# EAGLE board Neutrino-150 (EAGLE 6.1)
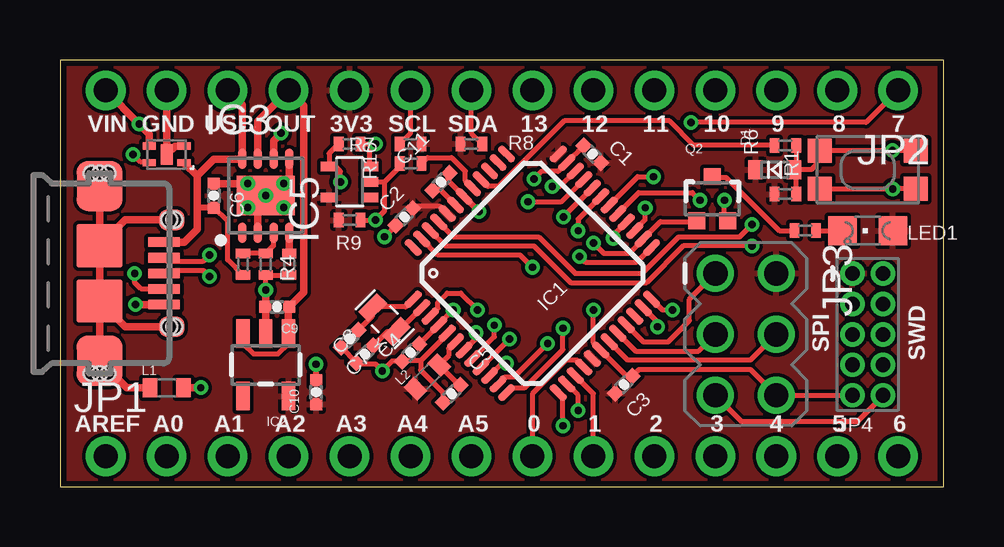
[diagram p0: board, top side]
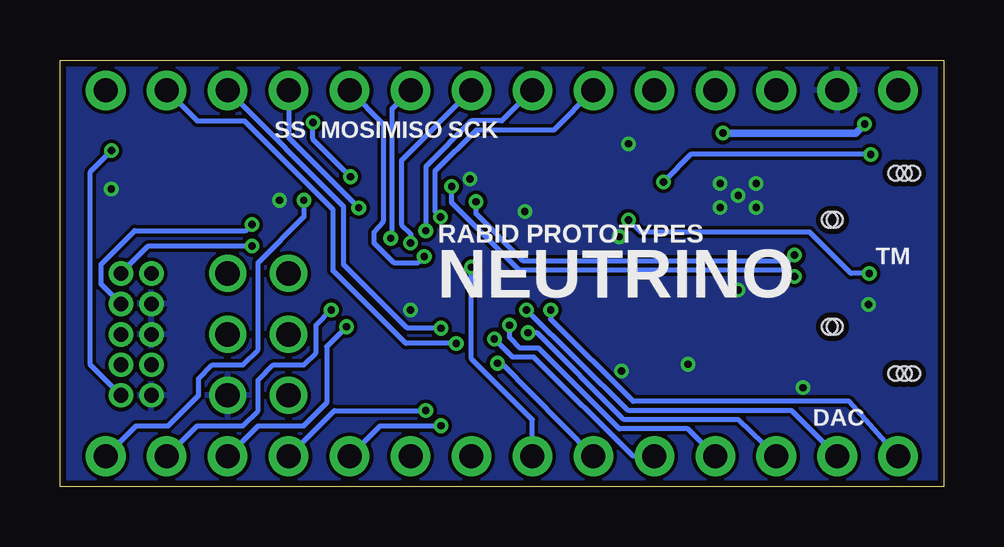
[diagram p1: board, bottom side, seen from below]

Size 36.83 x 17.78 mm. Coordinates in mm from the lower left corner, seen from the top.
Outline: 0,17.78 0,0 36.83,0 36.83,17.78 0,17.78
Copper layers (1*16): Top 0.035mm / dielectric 0.5mm / Bottom 0.035mm
Design rules: minimum track width 6mil, minimum drill 12mil, track to track 6mil, track to pad 6mil, pad to pad 6mil, via to via 6mil, smd to smd 4mil, copper to edge 10mil, drill to drill 10mil, minimum pad ring 6mil, minimum via ring 6mil, stop-mask expansion 1mil, vias tented up to drill 30mil, thermal gap 6mil
Net classes: 0 default: width 0.152 mm, drill 0.305 mm, clearance 0.152 mm; 1 USB: width 0.152 mm, drill 0.305 mm, clearance 0.152 mm; 2 gnd: width 0.152 mm, drill 0.305 mm, clearance 0.152 mm; 3 usbvcc: width 0.152 mm, drill 0.305 mm, clearance 0.152 mm; 4 USBpair: width 0.152 mm, drill 0.305 mm, clearance 0.152 mm

## Footprints (pad centres in the part's own frame; a part is rotated, then mirrored left to right if it is on the bottom)
0402-CAP = smd 0.5 x 0.5: 1 -0.5,0; 2 0.5,0
SOD-523 = smd 0.8 x 0.6: A 0,-0.8; K 0,0.8
INTEGRATEDCIRCUITS_TQFP48-7X7 = smd 0.85 x 0.32: 1 -4.275,2.75; 2 -4.275,2.25; 3 -4.275,1.75; 4 -4.275,1.25; 5 -4.275,0.75; 6 -4.275,0.25; 7 -4.275,-0.25; 8 -4.275,-0.75; 9 -4.275,-1.25; 10 -4.275,-1.75; 11 -4.275,-2.25; 12 -4.275,-2.75; 25 4.275,-2.75; 26 4.275,-2.25; 27 4.275,-1.75; 28 4.275,-1.25; 29 4.275,-0.75; 30 4.275,-0.25; 31 4.275,0.25; 32 4.275,0.75; 33 4.275,1.25; 34 4.275,1.75; 35 4.275,2.25; 36 4.275,2.75 | smd 0.32 x 0.85: 13 -2.75,-4.275; 14 -2.25,-4.275; 15 -1.75,-4.275; 16 -1.25,-4.275; 17 -0.75,-4.275; 18 -0.25,-4.275; 19 0.25,-4.275; 20 0.75,-4.275; 21 1.25,-4.275; 22 1.75,-4.275; 23 2.25,-4.275; 24 2.75,-4.275; 37 2.75,4.275; 38 2.25,4.275; 39 1.75,4.275; 40 1.25,4.275; 41 0.75,4.275; 42 0.25,4.275; 43 -0.25,4.275; 44 -0.75,4.275; 45 -1.25,4.275; 46 -1.75,4.275; 47 -2.25,4.275; 48 -2.75,4.275
SOT23-5 = smd 0.55 x 1.2: 1 -0.95,-1.3; 2 0,-1.3; 3 0.95,-1.3; 4 0.95,1.3; 5 -0.95,1.3
8-VDFN = smd 0.35 x 0.85: 1 -0.975,-1.545; 2 -0.325,-1.545; 3 0.325,-1.545; 4 0.975,-1.545; 5 0.975,1.545; 6 0.325,1.545; 7 -0.325,1.545; 8 -0.975,1.545 | smd 2.4 x 1.65: P0 0,0 | drill 0.305 pad 0.61: V0 -0.75,0.5; V1 0.75,0.5; V2 0,0; V3 -0.75,-0.5; V4 0.75,-0.5
TDFN4 = smd 0.86 x 0.5: 0 0,0 | smd 0.3 x 0.55: 1 -0.35,-0.725; 2 0.35,-0.725; 3 0.35,0.725; 4 -0.35,0.725
SC70-5 = smd 0.4 x 0.7: 1 -0.65,-0.85; 2 0,-0.85; 3 0.65,-0.85; 4 0.65,0.85; 5 -0.65,0.85
1X14_NO_SILK_SMALLPADS = drill 1 pad 1.65: 1 -16.51,0; 2 -13.97,0; 3 -11.43,0; 4 -8.89,0; 5 -6.35,0; 6 -3.81,0; 7 -1.27,0; 8 1.27,0; 9 3.81,0; 10 6.35,0; 11 8.89,0; 12 11.43,0; 13 13.97,0; 14 16.51,0
CONNETTORI_2X03 = drill 1.016 pad 1.55: 1 -2.54,-1.27; 2 -2.54,1.27; 3 0,-1.27; 4 0,1.27; 5 2.54,-1.27; 6 2.54,1.27
CONNETTORI_PINHEAD-2X5-P127 = drill 0.61 pad 1.016: 1 -0.635,2.54; 2 0.635,2.54; 3 -0.635,1.27; 4 0.635,1.27; 5 -0.635,0; 6 0.635,0; 7 -0.635,-1.27; 8 0.635,-1.27; 9 -0.635,-2.54; 10 0.635,-2.54
0603-TDK = smd 0.6 x 0.8: 1 -0.7,0; 2 0.7,0
CHIPLED_0805 = smd 1.2 x 1.2: A 0,-1.05; C 0,1.05
SOT323 = smd 0.7 x 0.7: 1 -0.65,-0.925; 2 0.65,-0.925; 3 0,0.925
R0402-VISHAY = smd 0.4 x 0.6: 1 -0.45,0; 2 0.45,0
KMR2 = smd 1 x 1: 1 2,0.8; 2 2,-0.8; 3 -2,0.8; 4 -2,-0.8
TP-SP = smd 0.8 x 0.8 bottom: X 0,0
MOLEX_USB_MICRO_AB = smd 0.4 x 1.35: P1 -1.3,2.675; P2 -0.65,2.675; P3 0,2.675; P4 0.65,2.675; P5 1.3,2.675 | smd 2.075 x 1.9: S1 -3.638,0; S2 3.638,0 | smd 0.85 x 1.05: S3 -2.225,3; S4 2.225,3 | smd 1.8 x 1.9: S5 -1.15,0; S6 1.15,0 | hole 0.6: 4.175,0.35; 4.175,-0.35; 4.175,0; -4.175,0.35; -4.175,-0.35; -4.175,0 | hole 0.65: -2.225,2.9; -2.225,3.1; 2.225,2.9; 2.225,3.1
CRYSTAL-SMD-2.0X1.2 = smd 0.6 x 1.1: 1 -0.7,0; 2 0.7,0

## Placement (x,y rotation side)
C1  100nF  [0402-CAP]  22.18,13.86 135 top
C2  100nF  [0402-CAP]  14.35,11.24 225 top
C3  100nF  [0402-CAP]  23.5,4.25 225 top
C4  100nF  [0402-CAP]  14.61,5.59 225 top
C5  100nF  [0402-CAP]  16.32,3.87 225 top
C6  100nF  [0402-CAP]  6.41,12.13 90 top
C7  22pF  [0402-CAP]  12.06,6.16 45 top
C8  22pF  [0402-CAP]  12.7,5.52 45 top
C9  1uF  [0402-CAP]  9.04,7.49 180 top
C10  1uF  [0402-CAP]  10.67,3.94 90 top
C11  1uF  [0402-CAP]  15.88,12.7 45 top
D1  [SOD-523]  29.78,13.21 90 top
IC1  SAMD21G18A-AUT  [INTEGRATEDCIRCUITS_TQFP48-7X7]  19.68,8.89 45 top
IC2  AP2112K-3.3  [SOT23-5]  8.57,5.08 180 top
IC3  TPS2115  [8-VDFN]  8.57,12.13 0 top
IC4  SIP32401A  [TDFN4]  4.45,13.84 90 top
IC5  MC74VHC1G14DFT  [SC70-5]  12.06,12.7 90 top
JP1  [1X14_NO_SILK_SMALLPADS]  18.41,1.27 0 top
JP2  [1X14_NO_SILK_SMALLPADS]  18.41,16.51 180 top
JP3  SPI  [CONNETTORI_2X03]  28.57,6.35 270 top
JP4  SWD  [CONNETTORI_PINHEAD-2X5-P127]  33.66,6.35 0 top
L1  [0603-TDK]  4.45,4.13 0 top
L2  [0603-TDK]  15.3,4.57 45 top
LED1  Green  [CHIPLED_0805]  33.66,10.67 90 top
Q2  NFET  [SOT323]  27.18,12 0 top
R1  100K  [R0402-VISHAY]  30.23,12.19 180 top
R2  1K  [R0402-VISHAY]  9.55,9.27 90 top
R3  100K  [R0402-VISHAY]  7.62,9.27 90 top
R4  100K  [R0402-VISHAY]  8.57,9.27 90 top
R5  330  [R0402-VISHAY]  31.05,10.67 0 top
R6  330  [R0402-VISHAY]  30.23,14.22 0 top
R7  4.7K  [R0402-VISHAY]  14.61,14.29 0 top
R8  4.7K  [R0402-VISHAY]  17.14,14.29 180 top
R9  100K  [R0402-VISHAY]  12.06,11.11 180 top
R10  330  [R0402-VISHAY]  14.61,13.46 0 top
R11  100K  [R0402-VISHAY]  12.06,14.29 180 top
SW1  [KMR2]  33.66,13.21 180 top
TP_0  TP_SP  [TP-SP]  19.68,1.27 0 top
TP_1  TP_SP  [TP-SP]  22.23,1.27 0 top
TP_2  TP_SP  [TP-SP]  24.77,1.27 0 top
TP_3  TP_SP  [TP-SP]  27.3,1.27 180 top
TP_3V3  TP_SP  [TP-SP]  12.06,16.51 0 top
TP_4  TP_SP  [TP-SP]  29.84,1.27 180 top
TP_5  TP_SP  [TP-SP]  32.38,1.27 180 top
TP_5V  TP_SP  [TP-SP]  1.91,16.51 0 top
TP_6  TP_SP  [TP-SP]  34.92,1.27 180 top
TP_7  TP_SP  [TP-SP]  34.92,16.51 0 top
TP_8  TP_SP  [TP-SP]  32.38,16.51 0 top
TP_9  TP_SP  [TP-SP]  29.84,16.51 0 top
TP_10  TP_SP  [TP-SP]  27.3,16.51 0 top
TP_12  TP_SP  [TP-SP]  22.23,16.51 0 top
TP_13  TP_SP  [TP-SP]  19.68,16.51 0 top
TP_A0  TP_SP  [TP-SP]  4.45,1.27 0 top
TP_A1  TP_SP  [TP-SP]  6.99,1.27 0 top
TP_A2  TP_SP  [TP-SP]  9.53,1.27 0 top
TP_A3  TP_SP  [TP-SP]  12.06,1.27 0 top
TP_A4  TP_SP  [TP-SP]  14.61,1.27 0 top
TP_A5  TP_SP  [TP-SP]  17.14,1.27 0 top
TP_AREF  TP_SP  [TP-SP]  1.91,1.27 0 top
TP_MOSI  TP_SP  [TP-SP]  24.77,16.51 0 top
TP_SCL  TP_SP  [TP-SP]  14.61,16.51 0 top
TP_SDA  TP_SP  [TP-SP]  17.14,16.51 0 top
USB  MICRO-AB  [MOLEX_USB_MICRO_AB]  1.65,8.89 270 top
Y1  32,768Khz  [CRYSTAL-SMD-2.0X1.2]  13.53,6.97 135 top

## Library data of the parts
C1-C11 IC3 IC4 USB = swift
D1 R1-R11 SW1 = adafruit
IC1 = Arduino-Neutrino-082
IC2 = SparkFun-PowerIC; PROD_ID: VREG-12189; VALUE: AP2202-ADJ
IC5 = 74xx-little-us
JP1 JP2 = SparkFun-Connectors
JP3 = Arduino-Neutrino-082; MONTHLY_USAGE: _____; PART_NUMBER: PH254-203DF118A00V; PRICE: _____; SUPPLIER: _____; TYPE: Connettori; VALUE: ICSP
JP4 = Arduino-Neutrino-082; VALUE: PINHEAD-2x5-P1.27
L1 L2 = SparkFun-Passives
LED1 = Opto; MONTHLY_USAGE: _____; PART_NUMBER: KPT-2012YC; PRICE: _____; SUPPLIER: _____; TYPE: Opto
Q2 = SparkFun-DiscreteSemi; PROD_ID: TRANS-11151
TP_0 TP_1-TP_3 TP_3V3 TP_4 TP_5 TP_5V TP_6-TP_10 TP_12 TP_13 TP_A0 TP_A1-TP_A5 TP_AREF TP_MOSI TP_SCL TP_SDA = SmartPrj
Y1 = SparkFun-FreqCtrl

## Nets
3.3V: C1.1 C2.1 C3.2 C10.1 D1.K IC1.17 IC1.36 IC1.44 IC2.5 IC5.5 JP2.10 JP3.2 JP4.1 L2.1 LED1.A R1.2 R7.2 R8.2 R9.2 TP_3V3.X
+5V [usbvcc]: TP_5V.X
D1: IC3.3 R3.2 R4.2
DGI_GPIO0: IC1.22
DGI_GPIO1: IC1.30 JP2.1 TP_7.X
DGI_GPIO2: IC1.11 JP2.2 TP_8.X
DGI_GPIO3: IC1.12 JP2.3 TP_9.X
GND [gnd]: C1.2 C2.2 C3.1 C4.2 C5.2 C6.2 C7.1 C8.1 C9.2 C10.2 C11.2 IC1.5 IC1.18 IC1.35 IC1.42 IC2.2 IC3.2 IC3.5 IC3.P0 IC3.V0 IC3.V1 IC3.V2 IC3.V3 IC3.V4 IC4.0 IC4.2 IC5.3 JP2.13 JP3.6 JP4.3 JP4.5 JP4.9 L1.2 Q2.2 R2.1 R4.1 R11.1 SW1.1 SW1.3 USB.P5
IC4_EN: IC4.4 IC5.4 R11.2
ILIM: IC3.4 R2.2
MISO: IC1.28 JP2.6 TP_12.X
MOSI: IC1.25 JP2.5 TP_MOSI.X
N$1: LED1.C R5.2
N$3: Q2.3 R5.1
N$7: IC5.2 R9.1 R10.1 USB.P4
PA00_XIN32: C7.2 IC1.1 Y1.2
PA01_XOUT32: C8.2 IC1.2 Y1.1
PA02_AIN0: IC1.3 JP1.2 TP_A0.X
PA03_AREFA: C4.1 IC1.4 JP1.1 TP_AREF.X
PA04_AIN4: IC1.9 JP1.5 TP_A3.X
PA05_AIN5: IC1.10 JP1.6 TP_A4.X
PA08_TCC0-W0: IC1.13 JP1.10 TP_2.X
PA09_TCC0-W1: IC1.14 JP1.11 TP_3.X
PA10_TCC0-W2: IC1.15 JP1.9 TP_1.X
PA11_TCC0-W3: IC1.16 JP1.8 TP_0.X
PA14_TCC0-W4: IC1.23 JP1.12 TP_4.X
PA15_TCC0-W5: IC1.24 JP1.13 TP_5.X
PA20_TCC0-W6: IC1.29 JP1.14 TP_6.X
PA27_TX_LED: IC1.39
PA28_USB_HOST_EN: IC1.41 R10.2
PA30_SWCLK: IC1.45 JP4.4
PA31_SWDIO: IC1.46 JP4.2
PB02_AIN10: IC1.47 JP1.7 TP_A5.X
PB03_RX_LED: IC1.48
PB08_AIN2: IC1.7 JP1.3 TP_A1.X
PB09_AIN3: IC1.8 JP1.4 TP_A2.X
PB10_S4_SPI_MOSI: IC1.19 JP3.4
PB11_S4_SPI_SCK: IC1.20 JP3.3
PB12_S4_SPI_MISO: IC1.21 JP3.1
RESET: D1.A JP3.5 JP4.10 R1.1 R6.2 SW1.2 SW1.4
RXD: IC1.38
SCK: IC1.26 JP2.7 Q2.1 TP_13.X
SCL: IC1.32 JP2.9 R7.1 TP_SCL.X
SDA: IC1.31 JP2.8 R8.1 TP_SDA.X
SHIELD [gnd]: L1.1 USB.S1 USB.S2 USB.S3 USB.S4 USB.S5 USB.S6
SS: IC1.27 JP2.4 TP_10.X
TARGET_RESET_EDBG: IC1.40 R6.1
TARGET_USB_N [USBpair]: IC1.33 USB.P2
TARGET_USB_P [USBpair]: IC1.34 USB.P3
TXD: IC1.37
VBUS [usbvcc]: C6.1 IC3.8 IC4.1 JP2.12 R3.1 USB.P1
VDDANA: C5.1 IC1.6 L2.2
VDDCORE: C11.1 IC1.43
VIN [usbvcc]: IC3.6 IC4.3 JP2.14
VOUT: C9.1 IC2.1 IC2.3 IC3.7 JP2.11

## Tracks (layer width: path | path; a pad name or v marks a point on that pad's centre or on a via)
3.3V
  Top 0.203: IC1.44 15.83,11.68 14.8,11.68 14.73,11.62
  pour Top (isolate 0.152, rank 2): 0,17.78 36.83,17.78 36.83,0 0,0
D1
  Top 0.203: IC3.3 8.89,10.04 R4.2 R3.2
DGI_GPIO1  (via drill 0.3)
  Top 0.203: JP2.1 33.59,15.18 v26.29,15.18 | IC1.30 24.07,12.92 v24.73,12.92
  Bottom 0.203: v26.29,15.18 26.29,14.48 v24.73,12.92
DGI_GPIO2  (via drill 0.3)
  Top 0.203: IC1.11 18.54,4.57 18.92,4.57 v20.32,5.97
  Top 0.254: IC1.11
  Bottom 0.203: JP2.2 31.11,15.24 29.15,15.24 25.46,11.56 25.46,9.02 22.42,5.97 v20.32,5.97
DGI_GPIO3  (via drill 0.3)
  Top 0.203: IC1.12 18.8,4.13 19.37,4.13 20.95,5.71 v20.95,6.6
  Bottom 0.203: JP2.3 25.02,11.68 25.02,9.27 22.35,6.6 v20.95,6.6
GND  (via drill 0.3)
  Top 0.203: SW1.1 v34.7,12.41 SW1.3 | IC1.42 16.16,12.76 C11.2 | JP4.9 JP3.6 28.77,4.89 24.13,4.89 C3.1 23.61,4.61 IC1.18 22.23,6 v22.23,7.37 | v19.75,12.83 20.07,13.14 20.76,13.14 IC1.35 arc0 C1.2 | C2.2 v13.53,10.41 | C5.2 15.97,3.91 15.02,4.85 15.02,5.24 | IC1.5 16.13,6.35 15.02,5.24 | C8.1 12.42,5.14 12.38,5.14 | C8.1 12.47,5.12 13.14,5.12 v13.43,4.83 13.84,5.23 C4.2 14.37,5.24 15.02,5.24 | C7.1 C8.1 | 9.45,11.63 IC3.V4 | Q2.2 27.69,11.11 v27.69,11.94 | 9.39,8.82 R2.1 R4.1 v8.57,8.19 | IC5.3 12.91,14.06 v13.14,14.29 R11.1
  Top 0.254: IC1.42 v17.46,11.47 | C10.2 v10.67,5.11
  Top 0.305: L1.2 v5.87,4.13 | USB.P5 v3.14,7.59 | IC3.5 9.55,12.19 8.69,12.19 | 8.69,12.19 IC3.V2 8.25,12.19 | IC3.V4 8.69,12.19 | IC3.V3 IC3.V0 C6.2 | IC3.2 8.25,12.19 | 8.25,12.19 7.82,12.19 | IC4.2 4.79,14.19 IC4.0 JP2.13 | v8.57,8.19 8.57,7.52 C9.2 8.57,7.46 IC2.2
  pour Bottom (isolate 0.152, rank 2): 0,17.78 36.83,17.78 36.83,0 0,0
IC4_EN  (via drill 0.3)
  Top 0.203: IC4.4 3.62,13.53 3.37,13.53 v3.05,13.84 | R11.2 11.21,13.89 IC5.4 11.48,13.35 11.68,13.14 v11.68,12.7
  Bottom 0.203: v3.05,13.84 10.54,13.84 v11.68,12.7
ILIM
  Top 0.305: IC3.4 9.55,9.74 R2.2
MISO  (via drill 0.3)
  Top 0.203: IC1.28 23.05,10.49 v23.05,10.35
  Bottom 0.203: v23.05,10.35 22.99,10.41 22.99,15.75 TP_12.X
MOSI  (via drill 0.3)
  Top 0.203: IC1.25 24,9.34 21.91,9.34 v21.65,9.59
  Bottom 0.203: JP2.5 23.37,15.11 23.37,11.05 23.75,10.6 23.75,10.16 22.92,9.34 21.91,9.34 v21.65,9.59
N$1
  Top 0.203: R5.2 LED1.C
N$3
  Top 0.203: Q2.3 27.21,12.89 27.75,12.89 29.97,10.67 R5.1 30.54,10.86
N$7  (via drill 0.3)
  Top 0.203: v3.11,8.89 3.11,8.51 3.37,8.26 4.33,8.26 USB.P4 | IC5.2 13.53,12.7 | 13.53,12.7 14.16,13.34 R10.1 | R9.1 v13.14,11.11 13.53,11.49 13.53,12.7
  Bottom 0.203: v3.11,8.89 3.87,8.89 5.59,10.6 12.64,10.6 v13.14,11.11
PA00_XIN32
  Top 0.203: C7.2 13.02,7.11 Y1.2 13.12,7.49 14.4,7.49 IC1.1 14.56,7.66
PA01_XOUT32
  Top 0.203: IC1.2 14.15,6.53 Y1.1 13.65,6.48 C8.2
PA02_AIN0  (via drill 0.3)
  Top 0.203: IC1.3 15.75,7.43 15.75,7.68 16.13,8.06 16.7,8.06 v17.4,7.37
  Bottom 0.203: TP_A0.X 6.35,3.17 13.14,3.17 v17.4,7.37
PA03_AREFA  (via drill 0.3)
  Top 0.203: C4.1 IC1.4 v16.38,7.37
  Bottom 0.203: v16.38,7.37 16.38,6.99 12.95,3.56 3.94,3.56 TP_AREF.X
PA04_AIN4  (via drill 0.3)
  Top 0.203: IC1.9 v18.73,6.16
  Bottom 0.203: JP1.5 12.95,1.27 17.08,5.4 17.97,5.4 v18.73,6.16
PA05_AIN5  (via drill 0.3)
  Top 0.203: v18.61,5.14 18.41,5.14 IC1.10
  Bottom 0.203: TP_A4.X 18.41,5.14 v18.61,5.14
PA08_TCC0-W0  (via drill 0.3)
  Top 0.203: v20.95,2.54 20.95,3.73 IC1.13
  Bottom 0.203: JP1.10 23.5,2.54 v20.95,2.54
PA09_TCC0-W1  (via drill 0.3)
  Top 0.203: v21.59,3.17 21.59,3.8 IC1.14
  Bottom 0.203: JP1.11 25.4,3.17 v21.59,3.17
PA10_TCC0-W2
  Top 0.203: TP_1.X 22.23,3.88 IC1.15
PA11_TCC0-W3
  Top 0.203: IC1.16 21.54,5.27 21.08,5.27 19.68,3.87 JP1.8
PA14_TCC0-W4  (via drill 0.3)
  Top 0.203: IC1.23 24.89,6.87 v24.89,6.67
  Bottom 0.203: JP1.12 28.57,2.54 26.67,2.54 25.72,3.49 25.72,5.84 v24.89,6.67
PA15_TCC0-W5  (via drill 0.3)
  Top 0.203: IC1.24 25.1,7.37 v25.53,7.37
  Bottom 0.203: JP1.13 31.11,2.54 29.21,2.54 28.57,3.17 28.57,4.45 27.94,5.08 26.67,5.08 26.16,5.59 26.16,6.73 v25.53,7.37
PA20_TCC0-W6  (via drill 0.3)
  Top 0.203: IC1.29 24.11,12.26 26.35,12.26 v26.67,11.94
  Bottom 0.203: JP1.14 33.66,2.54 32.32,2.54 31.05,3.81 31.05,4.51 30.48,5.08 29.21,5.08 28.57,5.71 28.57,9.34 26.67,11.24 v26.67,11.94
PA28_USB_HOST_EN
  Top 0.203: IC1.41 16.89,12.74 16.89,13.15 16.32,13.72 15.3,13.72 15.07,13.48 R10.2
PA30_SWCLK  (via drill 0.3)
  Top 0.203: IC1.45 16.39,10.41 19.94,10.41 21.46,8.89 24.26,8.89 25.78,10.41 28.32,10.41 v28.83,10.92
  Bottom 0.203: v28.83,10.92 29.08,10.67 33.72,10.67 35.12,9.27 35.12,8.45 JP4.4
PA31_SWDIO  (via drill 0.3)
  Top 0.203: v28.83,10.03 25.97,10.03 24.45,8.51 21.27,8.51 19.75,10.03 16.07,10.03 IC1.46
  Bottom 0.203: JP4.2 33.15,10.03 v28.83,10.03
PB02_AIN10  (via drill 0.3)
  Top 0.203: v19.68,9.14 19.18,9.65 15.75,9.65 IC1.47
  Bottom 0.203: JP1.7 17.14,2.79 19.68,5.33 v19.68,9.14
PB08_AIN2  (via drill 0.3)
  Top 0.203: IC1.7 17.34,6.19 v17.34,6.41
  Bottom 0.203: TP_A1.X 8.57,2.79 13.34,2.79 16.95,6.41 v17.34,6.41
PB09_AIN3  (via drill 0.3)
  Top 0.203: IC1.8 18.1,6.24 v18.1,6.73
  Bottom 0.203: TP_A2.X 10.67,2.41 13.53,2.41 16.89,5.78 17.65,5.78 18.1,6.22 v18.1,6.73
PB10_S4_SPI_MOSI
  Top 0.203: JP3.4 28.77,5.27 23.66,5.27 IC1.19
PB11_S4_SPI_SCK
  Top 0.203: IC1.20 23.98,5.65 26.61,5.65 JP3.3
PB12_S4_SPI_MISO
  Top 0.203: IC1.21 24.31,6.03 25.34,6.03 26.23,6.92 26.23,7.81 JP3.1
RESET  (via drill 0.3)
  Top 0.203: 30.64,13.1 D1.A | D1.A 31.3,13.21 31.49,13.39 31.49,13.84 SW1.2 v34.69,14.01 SW1.4 | R1.1 30.68,13.11 D1.A | R6.2 30.68,13.24 D1.A | JP3.5 28.38,2.73 33.24,2.73 34.29,3.78 JP4.10
  Bottom 0.203: 34.29,3.78 JP4.10 35.56,5.08 35.56,13.13 v34.69,14.01
SCK  (via drill 0.3)
  Top 0.203: v22.23,10.16 22.67,9.72 23.69,9.72 IC1.26 25.02,11.04 26.43,11.04 Q2.1
  Bottom 0.203: JP2.7 22.61,13.59 22.61,10.92 22.23,10.54 v22.23,10.16
SCL  (via drill 0.3)
  Top 0.203: IC1.32 v20.97,11.24 | TP_SCL.X 14.61,14.74 R7.1
  Bottom 0.203: TP_SCL.X 16.26,14.86 19.49,14.86 21.21,13.14 21.21,11.56 21.21,11.47 v20.97,11.24
SDA  (via drill 0.3)
  Top 0.203: IC1.31 21.59,11.15 v21.59,10.67 | JP2.8 17.14,14.74 R8.1
  Bottom 0.203: JP2.8 18.41,15.24 19.68,15.24 21.59,13.34 v21.59,10.67
SHIELD
  Top 0.305: USB.S6 USB.S2 2.78,4.13 L1.1 | USB.S6 USB.S5 | USB.S5 USB.S1 | USB.S3 2.73,11.12 USB.S5 | USB.S4 2.73,6.67 USB.S6
SS  (via drill 0.3)
  Top 0.203: IC1.27 24.38,11.11 v24.38,11.62
  Bottom 0.203: JP2.4 27.3,14.54 v24.38,11.62
TARGET_RESET_EDBG
  Top 0.203: R6.1 26.42,14.22 25.4,15.24 21.02,15.24 18.29,12.51 17.83,12.51 IC1.40
TARGET_USB_N  (via drill 0.3)
  Top 0.152: 4.45,9.4 USB.P2
  Top 0.203: 4.45,9.4 5.97,9.4 v6.22,9.65 | v19.49,11.87 20.89,11.87 IC1.33
  Bottom 0.203: v6.22,9.65 6.48,9.4 17.53,9.4 19.49,11.37 v19.49,11.87
TARGET_USB_P  (via drill 0.3)
  Top 0.152: 4.45,9.02 USB.P3
  Top 0.203: 4.45,9.02 5.97,9.02 v6.22,8.76 | v20.51,12.51 20.83,12.51 IC1.34
  Bottom 0.203: v6.22,8.76 6.48,9.02 17.69,9.02 20.51,11.84 v20.51,12.51
VBUS
  Top 0.203: 4.36,10.22 USB.P1 | C6.1 6.99,11.06 6.99,9.46 R3.1
  Top 0.254: C6.1 5.71,11.63 5.71,11.75
  Top 0.305: JP2.12 7.6,15.92 IC3.8 7.58,13.65 6.41,13.65 5.71,12.95 | 5.71,12.95 5.71,11.75 5.71,10.73 5.17,10.19 USB.P1 | IC4.1 5.18,13.49 5.71,12.95
VDDANA
  Top 0.203: IC1.6 16.19,5.75 16.19,5.46 L2.2 16.61,4.26 C5.1
VDDCORE
  Top 0.203: IC1.43 15.81,12.41 C11.1
VIN  (via drill 0.3)
  Top 0.305: JP2.14 v3.3,15.11 3.72,14.7 IC4.3 | IC3.6 8.9,14.42 v9.21,14.73
  Bottom 0.305: v3.3,15.11 3.68,14.73 v9.21,14.73
VOUT
  Top 0.203: IC2.1 9.52,5.97 9.08,5.52 8.06,5.52 7.62,5.97 IC2.3 7.54,6.46
  Top 0.305: IC3.7 8.25,15.23 JP2.11 10.16,15.88 10.16,8.11 C9.1 | IC2.1 9.52,7.47 C9.1 | C9.1 9.54,7.52

## Text on the board
tPlace: VIN | GND | USB | OUT | 3V3 | SCL | SDA | 13 | 12 | 11 | 10 | 9 | 8 | 7 | SPI | SWD | AREF | A0 | A1 | A2 | A3 | A4 | A5 | 0 | 1 | 2 | 3 | 4 | 5 | 6
bPlace: SCK | MISO | MOSI | SS | RABID PROTOTYPES | TM | NEUTRINO | DAC
214bmp: D:/SmartProjects/Snc/a4_bn_logo2.bmp